# Altium PCB PCB2_sh.PcbDoc
Units mm, origin at the board's own origin, x right, y up, seen from the top; angles counter-clockwise.
Board outline 50.5 x 30.5 mm, 2 copper layers (Top Layer, Bottom Layer), stack 0.8 mm thick; 43 components, 37 nets, 194 pads, 7 vias.
Unrouted connection lines stored in the file: 94.
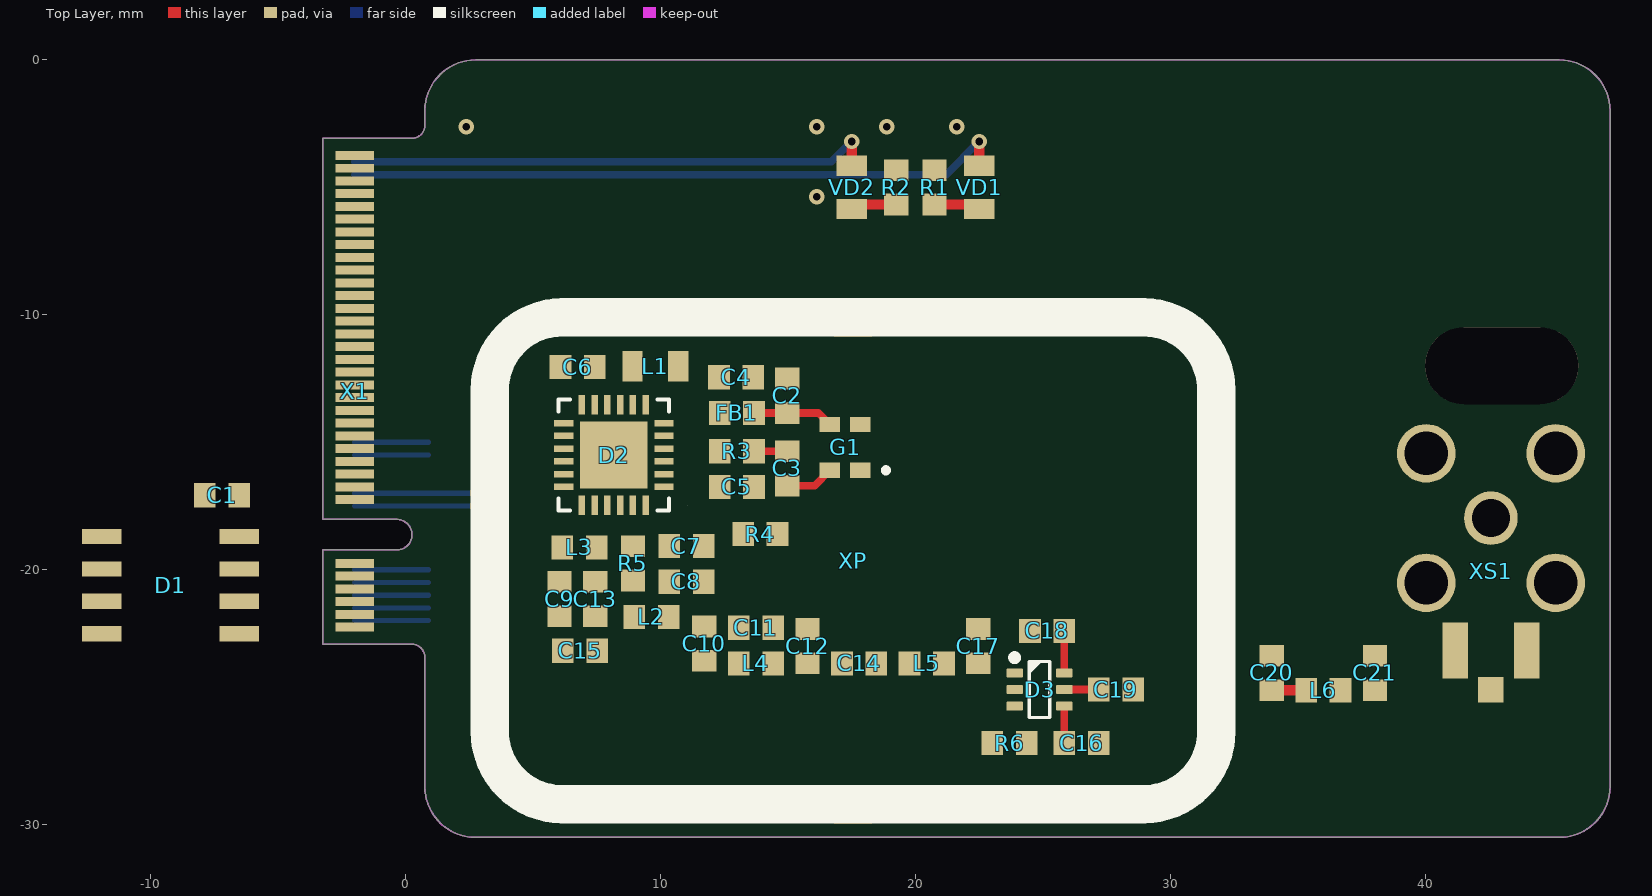
[diagram p0: Top Layer view]
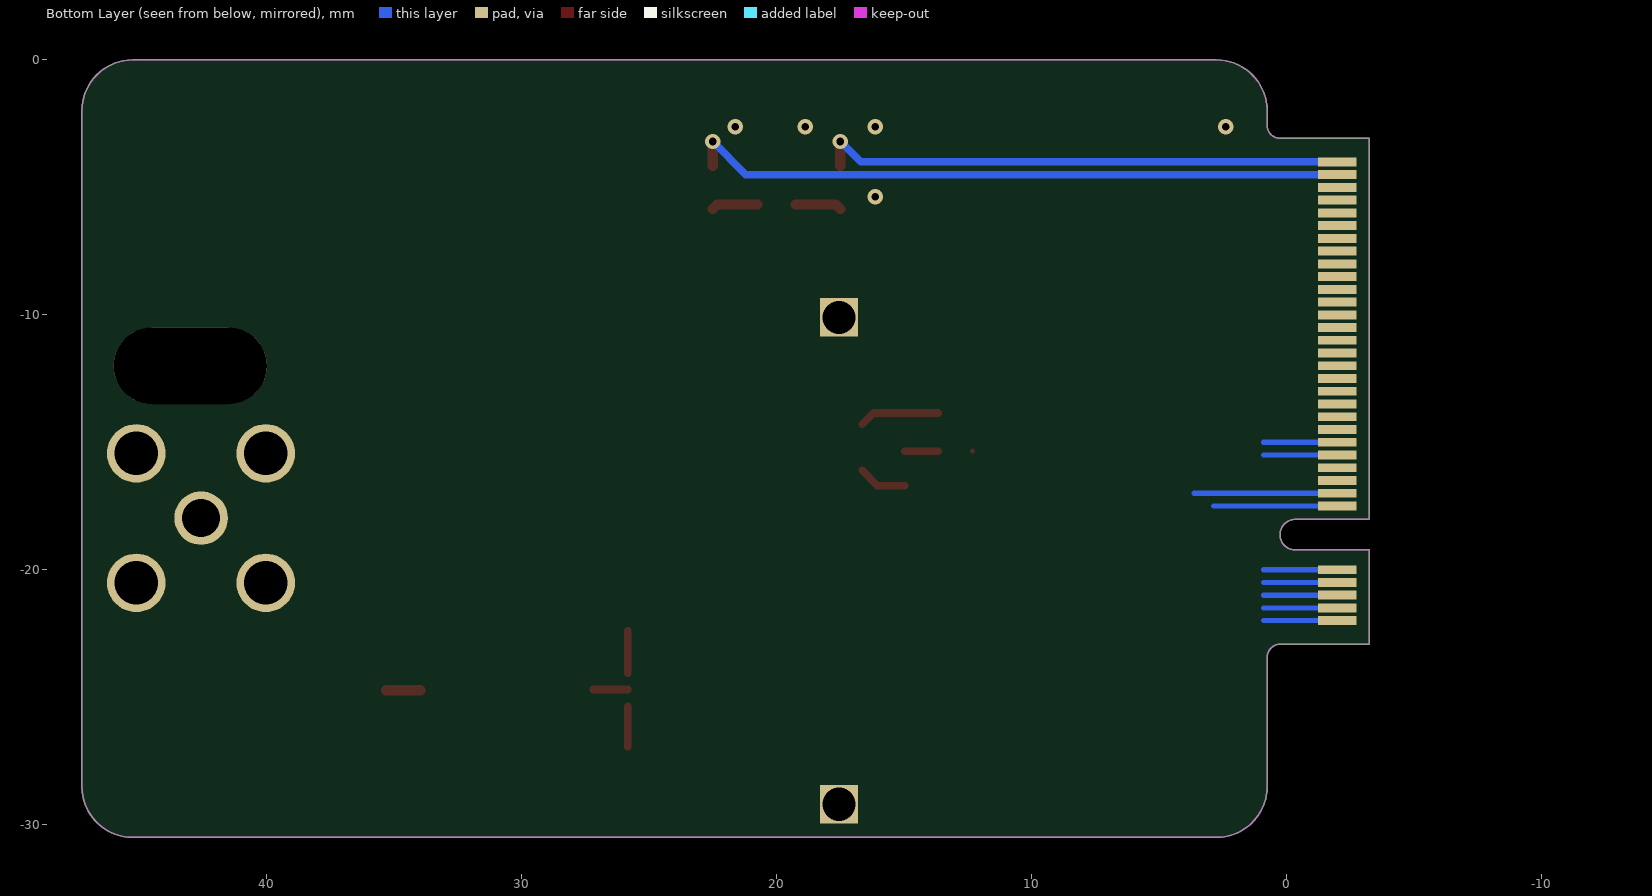
[diagram p1: Bottom Layer view, seen from below]

## Layer stack, top to bottom
Top Solder: solder mask 0.0102, Solder Resist, Dk 3.5
Top Layer: signal copper 0.035
Dielectric 1: dielectric 0.73, FR-4, Dk 4.8
Bottom Layer: signal copper 0.035
Bottom Solder: solder mask 0.0102, Solder Resist, Dk 3.5

## Board outline
-3.25,-19.225 -0.35,-19.225 ccw(c-0.35,-18.625) -0.35,-18.025 -3.25,-18.025 -3.25,-3.075 0.25,-3.075 ccw(c0.25,-2.575) 0.75,-2.575 0.75,-2 cw(c2.75,-2) 2.75,0 45.25,0 cw(c45.25,-2) 47.25,-2 47.25,-28.5 cw(c45.25,-28.5) 45.25,-30.5 2.75,-30.5 cw(c2.75,-28.5) 0.75,-28.5 0.75,-23.425 ccw(c0.25,-23.425) 0.25,-22.925 -3.25,-22.925

## Design rules (kind name [scope] priority, off if disabled: settings)
Clearance [All] p1: gap=0.15
ComponentClearance [All] p1: gap=0 collisioncheckmode=3 verticalgap=0 showdistances=FALSE
HoleSize [All] p1: absolutevalues=TRUE maxlimit=10 minlimit=0.3 maxpercent=80.000 minpercent=20.000
MinimumSolderMaskSliver [All] p1: minsoldermaskwidth=0.15
PolygonConnect PolygonConnect_1 [All vs IsVia] p1: connectstyle=Direct reliefconductorwidth=0.254 reliefentries=4 polygonreliefangle="90 Angle" airgapwidth=0.254
PolygonConnect [All] p2: connectstyle=Relief reliefconductorwidth=0.2 reliefentries=4 polygonreliefangle="90 Angle" airgapwidth=0.2
RoutingVias [All] p1: holewidth=0.3 width=0.6 viastyle="Through Hole" minholewidth=0.3 minwidth=0.6 maxholewidth=0.6 maxwidth=1
SilkToSilkClearance [All] p1: silktosilkclearance=0
SilkToSolderMaskClearance [IsPad] p1: minsilkscreentomaskgap=0 clearancetoexposedcopper=TRUE
SolderMaskExpansion [All] p1: expansion=0.102
Width [All] p1: maxlimit=1.5 minlimit=0.2 preferedwidth=0.2
25 further rules are at their usual default settings.

## Classes and differential pairs
component class Sheet2: C4 C5 C6 C7 C8 C9 C10 C11 C12 C13 C14 C15 C16 C17 C18 C19 C20 C21 D2 D3 L2 L3 L4 L5 R4 R5 R6
component class Sheet1: C1 C2 C3 D1 FB1 G1 R1 R2 R3 VD1 VD2 X1 XS1

## Components (designator, comment, footprint, x,y, rotation, side; value= is the part's Value field where it differs from the comment)
C1 "C" Ñ0603 -7.2,-17.075 r180 top
C2 "C" Ñ0603 14.966,-13.175 r90 top
C3 "C" Ñ0603 14.966,-16.025 r90 top
C4 "C" Ñ0603 12.966,-12.45 r180 top
C5 "C" Ñ0603 12.991,-16.75 r0 top
C6 "C" Ñ0603 6.75,-12.05 r180 top
C7 "C" Ñ0603 11.016,-19.075 r0 top
C8 "C" Ñ0603 11.016,-20.475 r0 top
C9 "C" Ñ0603 6.041,-21.15 r270 top
C10 "C" Ñ0603 11.716,-22.9 r90 top
C11 "C" Ñ0603 13.741,-22.275 r0 top
C12 "C" Ñ0603 15.766,-23 r90 top
C13 "C" Ñ0603 7.441,-21.15 r270 top
C14 "C" Ñ0603 17.791,-23.675 r0 top
C15 "C" Ñ0603 6.841,-23.175 r0 top
C16 "C" Ñ0603 26.516,-26.8 r0 top
C17 "C" Ñ0603 22.466,-23 r270 top
C18 "C" Ñ0603 25.166,-22.4 r180 top
C19 "C" Ñ0603 27.866,-24.7 r0 top
C20 "C" Ñ0603 33.975,-24.05 r90 top
C21 "C" Ñ0603 38.025,-24.05 r90 top
D1 "AT24MAC402 SOIC-8" SOIC8 -11.925,-18.7 r0 top
D2 "SX126x" QFN24_4X4_SEM 8.166,-15.5 r180 top
D3 "PE4259 SC-70" SC70-6 24.866,-24.7 r0 top
FB1 "Ferrite_Beads" R0603 12.991,-13.85 r0 top
G1 "32MHz" OSC_2016 17.241,-15.2 r90 top
L1 "L" IND_0805 9.8,-12.025 r180 top
L2 "L" INDC_0603 9.641,-21.85 r0 top
L3 "L" INDC_0603 6.816,-19.125 r0 top
L4 "L" INDC_0603 13.741,-23.675 r0 top
L5 "L" INDC_0603 20.441,-23.675 r0 top
L6 "L" INDC_0603 36,-24.725 r0 top
R1 "R" R0603 20.75,-5 r90 top
R2 "R" R0603 19.25,-5 r90 top
R3 "R" R0603 12.991,-15.35 r180 top
R4 "R" R0603 13.916,-18.6 r180 top
R5 "R" R0603 8.916,-19.75 r270 top
R6 "R" R0603 23.691,-26.8 r0 top
VD1 "LED" LED_0805 22.5,-5 r270 top
VD2 "LED" LED_0805 17.5,-5 r270 top
X1 "M.2" M.2_EDGE 0.75,-2.275 r90 top locked
XP "" "SHIELD 28.8*19.4" 17.55,-10.1 r0 top locked
XS1 "SMA/IPEX" SMA_ANGLED 42.575,-17.975 r270 top

## Footprints (in the part's own frame and the unit in brackets; to place one, negate y for a bottom-side part, rotate by r counter-clockwise, add the part's x,y. Pads: shape width x height; smd on the part's side, far side on the other; paste and mask are expansions set on the pad)
IND_0805 [mm]
  rect 0.8x1.2 smd: 1(-0.9,0) 2(0.9,0)
  body extent -1,-0.62 1,0.63, height 1.25
INDC_0603 [mm] "Chip Inductor, 2-Leads, Body 1,60x1,00mm, IPC Medium Density"
  rect 0.85x0.95 smd: 1(-0.675,0) 2(0.675,0)
  body extent -0.78,-0.42 0.79,0.42, height 0.59
LED_0805 [mm]
  rect 0.8x1.2 smd: 1(-0.85,0) 2(0.85,0)
  body extent -1.05,-0.67 1.05,0.68, height 0.9
M.2_EDGE [mm]
  rect 0.35x1.5 smd: 1(-19.975,2.75) 2(-19.475,2.75) 3(-18.975,2.75) 4(-18.475,2.75) 5(-17.975,2.75) 6(-17.475,2.75) 7(-14.975,2.75) 8(-14.475,2.75) 9(-13.975,2.75) 10(-13.475,2.75) 11(-12.975,2.75) 12(-12.475,2.75) 13(-11.975,2.75) 14(-11.475,2.75) 15(-10.975,2.75) 16(-10.475,2.75) 17(-9.975,2.75) 18(-9.475,2.75) 19(-8.975,2.75) 20(-8.475,2.75) 21(-7.975,2.75) 22(-7.475,2.75) 23(-6.975,2.75) 24(-6.475,2.75) 25(-5.975,2.75) 26(-5.475,2.75) 27(-4.975,2.75) 28(-4.475,2.75) 29(-3.975,2.75) 30(-3.475,2.75) 31(-2.975,2.75) 32(-2.475,2.75) 33(-1.975,2.75) 34(-1.475,2.75)
  rect 0.35x1.5 smd far side: 35(-1.725,2.75) 36(-2.225,2.75) 37(-2.725,2.75) 38(-3.225,2.75) 39(-3.725,2.75) 40(-4.225,2.75) 41(-4.725,2.75) 42(-5.225,2.75) 43(-5.725,2.75) 44(-6.225,2.75) 45(-6.725,2.75) 46(-7.225,2.75) 47(-7.725,2.75) 48(-8.225,2.75) 49(-8.725,2.75) 50(-9.225,2.75) 51(-9.725,2.75) 52(-10.225,2.75) 53(-10.725,2.75) 54(-11.225,2.75) 55(-11.725,2.75) 56(-12.225,2.75) 57(-12.725,2.75) 58(-13.225,2.75) 59(-13.725,2.75) 60(-14.225,2.75) 61(-14.725,2.75) 62(-15.225,2.75) 63(-17.725,2.75) 64(-18.225,2.75) 65(-18.725,2.75) 66(-19.225,2.75) 67(-19.725,2.75)
  Keep-Out Layer lines w0.05: -21.45,0 -21.15,0 ccw(c-21.15,0.5) -20.65,0.5 -20.65,4 -16.95,4 -16.95,1.1 ccw(c-16.35,1.1) -15.75,1.1 -15.75,4 -0.8,4 -0.8,0.5 ccw(c-0.3,0.5) -0.3,0 0,0
OSC_2016 [mm]
  rect 0.6x0.8 smd: 1(-0.9,-0.6) 2(0.9,-0.6) 3(0.9,0.6) 4(-0.9,0.6)
  silkscreen extent -1,-1.7 -0.8,-1.5, body extent -1,-0.8 1,0.8, height 0.7
QFN24_4X4_SEM [mm]
  rect 0.757x0.255 smd paste+0 mask+0: 1(-1.966,1.25) 2(-1.966,0.75) 3(-1.966,0.25) 4(-1.966,-0.25) 5(-1.966,-0.75) 6(-1.966,-1.25) 13(1.966,-1.25) 14(1.966,-0.75) 15(1.966,-0.25) 16(1.966,0.25) 17(1.966,0.75) 18(1.966,1.25)
  rect 0.255x0.757 smd paste+0 mask+0: 7(-1.25,-1.966) 8(-0.75,-1.966) 9(-0.25,-1.966) 10(0.25,-1.966) 11(0.75,-1.966) 12(1.25,-1.966) 19(1.25,1.966) 20(0.75,1.966) 21(0.25,1.966) 22(-0.25,1.966) 23(-0.75,1.966) 24(-1.25,1.966)
  rect 2.642x2.642 smd paste-1.308 mask+0: 25(0,0)
  silkscreen extent -2.17,-2.17 2.17,2.17, body extent -2.04,-2.04 2.05,2.05, height 0.99
R0603 [mm]
  rect 0.85x0.95 smd: 1(-0.675,0) 2(0.675,0)
  body extent -0.8,-0.4 0.8,0.4, height 0.45
SC70-6 [mm] "SC70-6; SOT-363"
  round 0.254 on Mech15: 0(0,0)
  rrect25% 0.65x0.35 smd mask+0.07: 1(-0.975,0.65) 2(-0.975,0) 3(-0.975,-0.65) 4(0.975,-0.65) 5(0.975,0) 6(0.975,0.65)
  silkscreen extent -1.1,-1.1 0.4,1.38, body extent -1.2,-1.1 1.2,1.1, height 1.1
"SHIELD 28.8*19.4" [mm] "ms288-10"
  rect 1.5x1.5 hole 1.3: 1(0,-19.1) 1(0,0)
  silkscreen extent -14.25,-19.1 14.25,0
SMA_ANGLED [mm]
  round 2.1 hole 1.5: 1(0,0)
  rect 1x1 smd: 1(6.724,0)
  round 2.3 hole 1.7: 2(-2.54,2.54) 2(-2.54,-2.54) 2(2.54,2.54) 2(2.54,-2.54)
  rect 2.2x1 smd: 2(5.2,-1.397) 2(5.2,1.397)
  body extent -3.5,-3.5 6.75,11, height 9.9
SOIC8 [mm]
  rect 1.55x0.6 smd: 1(0,0) 2(0,-1.27) 3(0,-2.54) 4(0,-3.81) 5(5.4,-3.81) 6(5.4,-2.54) 7(5.4,-1.27) 8(5.4,0)
  Top Layer region: 0,0 0,0 0,0 0,0
  body extent -0.3,-4.36 5.7,0.54, height 1.75
Ñ0603 [mm]
  rect 0.85x0.95 smd: 1(-0.675,0) 2(0.675,0)
  body extent -0.8,-0.4 0.8,0.4, height 0.9

## Part data
D1: library part AT24MAC402
D3: library part PE4259
G1: library part TCXO
VD1 VD2: library part VD_LED
XS1: library part 2pin

## Free pads (board coordinates)
  rrect100% 6x3 hole 3 slot 6 at 0 deg unplated: 0(43,-12)

## Via types
v1: diameter 0.6, hole 0.3, Top Layer to Bottom Layer, tented both sides, 7 vias

## Nets (pads, with @x,y where several pads share a name; then routed paths per layer and width w, separated by ;. In a path a pad name is that pad's centre, name@x,y a point inside that pad or via, vN(x,y) a via of type N, cw(c..) or ccw(c..) an arc to the next point about the centre after c; other vN are vias at no path point)
3V3: C1.1 C6.1 C18.1 D1.8 D2.10 D2.11 D3.6 R4.1 X1.59 X1.60 | length 1.7
  Top Layer w0.3: D3.6 C18.1
ANT: C21.1 L6.2 XS1.1
EEPROM_SCL: D1.6 X1.61 | length 5.6
  Bottom Layer w0.2: X1.61 3.625,-17
EEPROM_SDA: D1.5 X1.62 | length 4.9
  Bottom Layer w0.2: X1.62 2.855,-17.5
GND: C1.2 C2.2 C4.1 C5.2 C6.2 C7.2 C8.2 C9.2 C10.2 C12.2 C15.1 C16.2 C17.1 C18.2 C20.2 C21.2 D1.4 D2.2 D2.5 D2.8 D2.20 D2.25 D3.2 G1.1 G1.2 R1.2 R2.2 X1.57 X1.58 X1.63 X1.64 X1.65 X1.66 X1.67 XS1.2 | length 20.3
  Bottom Layer w0.2: X1.67 0.9,-22 ; X1.66 0.9,-21.5 ; X1.65 0.9,-21 ; X1.64 0.9,-20.5 ; X1.63 0.9,-20 ; X1.58 0.9,-15.5 ; X1.57 0.9,-15
  other v1: 16.125,-5.375 2.375,-2.625 16.125,-2.625 18.875,-2.625 21.625,-2.625
LED1: VD1.1 X1.36 | length 26
  Top Layer w0.4: VD1.1 v1(22.5,-3.2)
  Bottom Layer w0.3: X1.36 21.2,-4.5 v1(22.5,-3.2)
LED2: VD2.1 X1.35 | length 20.8
  Top Layer w0.4: VD2.1 v1(17.5,-3.2)
  Bottom Layer w0.3: X1.35 16.7,-4 v1(17.5,-3.2)
LORA_BUSY: D2.14 X1.12
LORA_DIO1: D2.13 X1.13
LORA_MISO: D2.16 X1.10
LORA_MOSI: D2.17 X1.9
LORA_NRST: D2.15 X1.11
LORA_NSS: D2.19 X1.7
LORA_SCK: D2.18 X1.8
NetC2_1: C2.1 FB1.2 G1.3 | length 3.2
  Top Layer w0.3: FB1.2 C2.1 16.191,-13.85 G1.3
NetC3_1: C3.1 G1.4 | length 1.9
  Top Layer w0.3: C3.1 16.041,-16.7 G1.4
NetC3_2: C3.2 R3.1 | length 1.3
  Top Layer w0.3: R3.1 C3.2
NetC4_2: C4.2 D2.7 L1.1
NetC5_1: C5.1 D2.1 R4.2
NetC7_1: C7.1 C8.1 D2.24 L2.2
NetC9_1: C9.1 D2.21 L3.1
NetC10_1: C10.1 C11.1 L2.1 L4.1 R5.2
NetC11_2: C11.2 C12.1 C14.1 L4.2
NetC13_1: C13.1 D2.22 L3.2
NetC13_2: C13.2 C15.2 D3.3
NetC14_2: C14.2 L5.1
NetC16_1: C16.1 D3.4 R6.2 | length 1.6
  Top Layer w0.3: C16.1@25.841,-26.95 D3.4
NetC17_2: C17.2 D3.1 L5.2
NetC19_1: C19.1 D3.5 | length 1.3
  Top Layer w0.3: D3.5 C19.1
NetC19_2: C19.2 C20.1 L6.1 | length 1.3
  Top Layer w0.4: C20.1 L6.1
NetD2_9: D2.9 L1.2
NetD2_12: D2.12 R6.1
NetD2_23: D2.23 R5.1
NetR1_1: R1.1 VD1.2 | length 1.8
  Top Layer w0.4: R1.1 22.325,-5.675 VD1.2
NetR2_1: R2.1 VD2.2 | length 1.8
  Top Layer w0.4: VD2.2 17.675,-5.675 R2.1
TCXO_VDD: D2.6 FB1.1
XTA: D2.3 R3.2 | length 0
pads on no net: D1.1 D1.2 D1.3 D1.7 D2.4 D3.0 X1.1 X1.2 X1.3 X1.4 X1.5 X1.6 X1.14 X1.15 X1.16 X1.17 X1.18 X1.19 X1.20 X1.21 X1.22 X1.23 X1.24 X1.25 X1.26 X1.27 X1.28 X1.29 X1.30 X1.31 X1.32 X1.33 X1.34 X1.37 X1.38 X1.39 X1.40 X1.41 X1.42 X1.43 X1.44 X1.45 X1.46 X1.47 X1.48 X1.49 X1.50 X1.51 X1.52 X1.53 X1.54 X1.55 X1.56 XP.1

## Keep-outs
Keep-Out Layer:
  lines w0.05: 0.75,-23.725 0.75,-28.5 ccw(c2.75,-28.5) 2.75,-30.5 45.25,-30.5 ccw(c45.25,-28.5) 47.25,-28.5 47.25,-2 ; 0.75,-2.275 0.75,-2 cw(c2.75,-2) 2.75,0 45.25,0 cw(c45.25,-2) 47.25,-2 ; 47.25,-2 47.25,-2